# Altium PCB DEV_BOARD_NEW.PcbDoc
Units mm, origin at the board's own origin, x right, y up, seen from the top; angles counter-clockwise.
Board outline 49.4 x 24.4 mm, 2 copper layers (Top Layer, Bottom Layer); 31 components, 27 nets, 149 pads, 9 vias.
Unrouted connection lines stored in the file: 2.
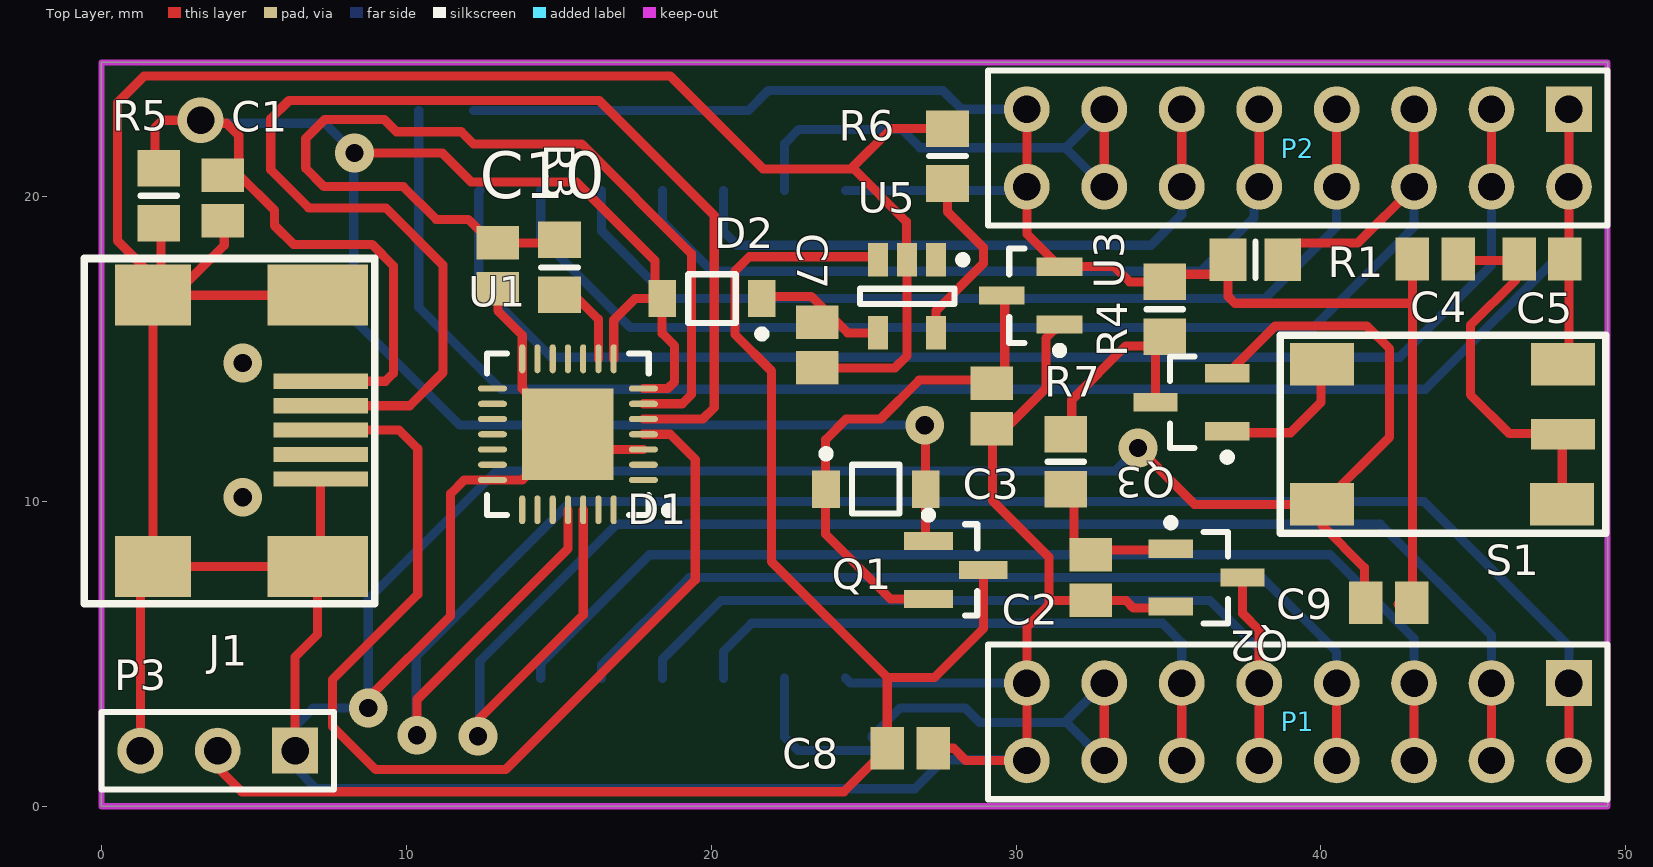
[diagram p0: Top Layer view]
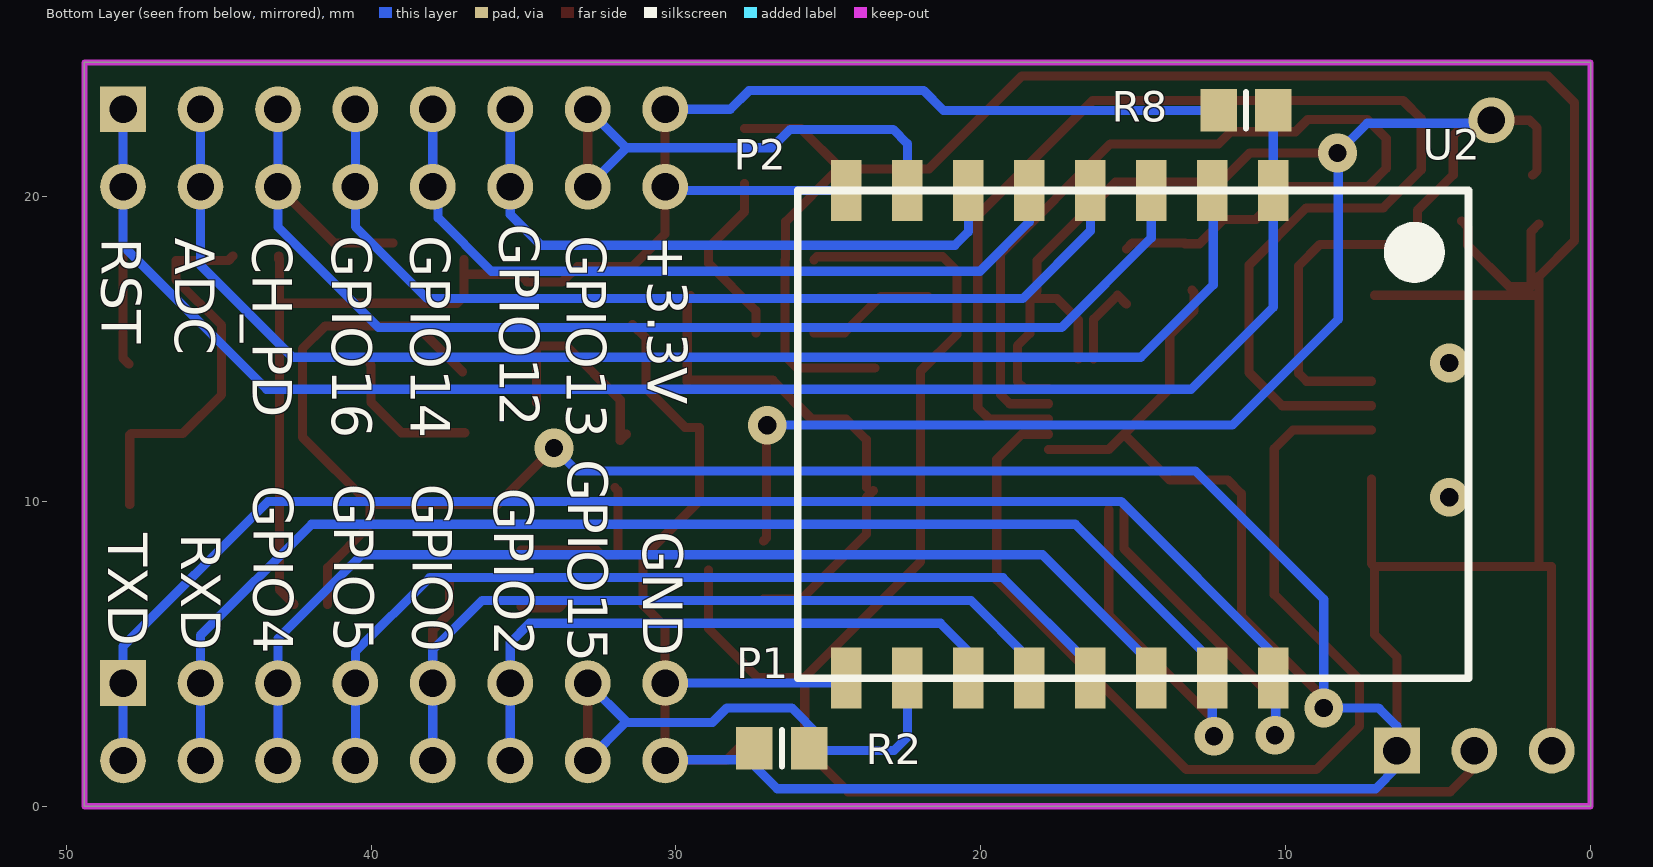
[diagram p1: Bottom Layer view, seen from below]

## Layer stack, top to bottom
Top Solder: solder mask 0.0102, Solder Resist, Dk 3.5
Top Layer: signal copper 0.0356
Dielectric 1: dielectric 0.32, FR-4, Dk 4.8
Bottom Layer: signal copper 0.0356
Bottom Solder: solder mask 0.0102, Solder Resist, Dk 3.5

## Board outline
0,0 49.4,0 49.4,24.4 0,24.4

## Design rules (kind name [scope] priority, off if disabled: settings)
Clearance [All] p1: gap=0.2
PolygonConnect [All] p1: connectstyle=Relief reliefconductorwidth=0.254 reliefentries=4 polygonreliefangle="90 Angle" airgapwidth=0.254
RoutingVias [All] p1: holewidth=0.6 width=1.3 viastyle="Through Hole" minholewidth=0.711 minwidth=1.27 maxholewidth=0.711 maxwidth=1.27
SilkToBoardRegionClearance [All] p1 off:
SilkToSilkClearance [All] p1 off: silktosilkclearance=0.254
SilkToSolderMaskClearance [IsPad] p1 off: minsilkscreentomaskgap=0.254 clearancetoexposedcopper=TRUE
SolderMaskExpansion [All] p1: expansion=0.102
Width [All] p1: maxlimit=0.5 minlimit=0.2 preferedwidth=0.3
26 further rules are at their usual default settings.

## Components (designator, comment, footprint, x,y, rotation, side; value= is the part's Value field where it differs from the comment)
C1 "1uF" C0805 3.975,19.95 r90 top
C2 "2.2uF" C0805 32.45,7.5 r90 top
C3 "1uF" C0805 29.2,13.125 r90 top
C4 "1uF" C0805 43.75,17.95 r180 top
C5 "100nF" C0805 47.25,17.95 r0 top
C7 "1uF" C0805 23.475,15.125 r90 top
C8 "1uF" C0805 26.525,1.9 r180 top
C9 "10uF" C0805 42.225,6.675 r0 top
C10 "100nF" C0805 13,17.725 r90 top
D1 "MBR0520LT1G" ONSC-SOD-123-2-425-04_V 25.4,10.4 r0 top
D2 "MBR0520LT1G" ONSC-SOD-123-2-425-04_V 20.025,16.65 r180 top
J1 "Mini usb_B" MINI_USB_B 4.2,12.2 r0 top locked
P1 "Header 8X2" HDR2X8 48.133,4.04 r180 top locked
P2 "Header 8X2" HDR2X8 48.133,22.86 r180 top locked
P3 "Header 3" HDR1X3 6.35,1.825 r180 top
Q1 "IRLML6402" SOT95P237X112-3N 28.025,7.75 r0 top
Q2 "BSS138" MICRO3_M 36.25,7.5 r0 top
Q3 "BSS138" MICRO3_M 35.75,13.25 r180 top
R1 "47K" 6-0805_N 37.85,17.925 r180 top
R2 "10K" 6-0805_N 26.525,1.9 r0 bottom
R3 "10K" 6-0805_N 15.025,17.675 r90 top
R4 "470K" 6-0805_N 34.875,16.3 r90 top
R5 "10K" 6-0805_N 1.875,20.025 r90 top
R6 "4K" 6-0805_N 27.75,21.325 r270 top
R7 "100K" 6-0805_N 31.625,11.3 r90 top
R8 "10K" 6-0805_N 11.3,22.825 r180 bottom
S1 "STMW" STMW 44,12.2 r180 top
U1 "CP2102-GM" SLAB-QFN-28-3125X3125TP_M 15.3,12.2 r180 top locked
U2 "ESP07" ESP07 15,12.2 r270 bottom locked
U3 "MCP1700T-3302E/TT" SOT-23-TT3_N 30.475,16.75 r180 top
U5 "MCP73831T-2ATI/OT" SOT-23-OT5_N 26.425,16.725 r270 top

## Footprints (in the part's own frame and the unit in brackets; to place one, negate y for a bottom-side part, rotate by r counter-clockwise, add the part's x,y. Pads: shape width x height; smd on the part's side, far side on the other; paste and mask are expansions set on the pad)
6-0805_N [mm] "Chip Resistor, Body 2.0x1.2mm, IPC Medium Density"
  rect 1.2x1.4 smd: 1(-0.9,0) 2(0.9,0)
  silkscreen extent 0,-0.6 0,0.6, body extent -1.07,-0.7 1.07,0.7, height 0.7
C0805 [mm]
  rect 1.1x1.4 smd: 1(-0.75,0) 2(0.75,0)
  body extent -1.1,-0.72 1.1,0.72, height 1.4
ESP07 [mm]
  rect 2x1 smd: 1(-8,4.594) 2(-8,2.594) 3(-8,0.594) 4(-8,-1.406) 5(-8,-3.406) 6(-8,-5.406) 7(-8,-7.406) 8(-8,-9.406) 9(8,4.594) 10(8,2.594) 11(8,0.594) 12(8,-1.406) 13(8,-3.406) 14(8,-5.406) 15(8,-7.406) 16(8,-9.406)
  silkscreen extent -8,-11 8,11
HDR1X3 [mm] "Connector; Header; 3 Position"
  rect 1.5x1.5 hole 0.9: 1(0,0)
  round 1.5 hole 0.9: 2(2.54,0) 3(5.08,0)
  silkscreen extent -1.27,-1.27 6.35,1.27
HDR2X8 [mm] "Connector; Header; 8x2 Position"
  rect 1.5x1.5 hole 0.9: 1(0,0)
  round 1.5 hole 0.9: 2(0,2.54) 3(2.54,0) 4(2.54,2.54) 5(5.08,0) 6(5.08,2.54) 7(7.62,0) 8(7.62,2.54) 9(10.16,0) 10(10.16,2.54) 11(12.7,0) 12(12.7,2.54) 13(15.24,0) 14(15.24,2.54) 15(17.78,0) 16(17.78,2.54)
  silkscreen extent -1.27,-1.27 19.05,3.81
MICRO3_M [mm] "SOT23, 3-Leads, Body 2.9x1.3mm, Pitch 0.95mm, Lead Span 2.3mm, IPC Low Density"
  rect 1.45x0.6 smd: 1(-1.175,0.95) 2(-1.175,-0.95) 3(1.175,0)
  silkscreen extent -1.3,-1.5 0.7,1.92, body extent -0.7,-1.5 0.7,1.5, height 1.12
MINI_USB_B [mm]
  rect 3.1x0.5 smd: 1(2.987,1.738) 2(2.987,0.938) 3(2.987,0.138) 4(2.987,-0.663) 5(2.987,-1.463)
  rect 2.5x2 smd: GND(-2.512,-4.337) GND(-2.512,4.563)
  rect 3.3x2 smd: GND(2.887,-4.337) GND(2.887,4.563)
  silkscreen extent -4.76,-5.56 4.76,5.76
ONSC-SOD-123-2-425-04_V [mm] "SOD, 2-Leads, Body 2.69x1.6mm"
  rect 0.91x1.22 smd: 1(-1.635,0) 2(1.635,0)
  silkscreen extent -1.76,-0.8 0.78,1.28, body extent -1.35,-0.8 1.35,0.8, height 1.35
SLAB-QFN-28-3125X3125TP_M [mm] "QFN, 28-Leads, Body 5x5mm, Pitch 0.5mm, Thermal Pad 3.13x3.13mm, IPC Low Density"
  oval 0.95x0.2 smd: 1(-2.475,1.5) 2(-2.475,1) 3(-2.475,0.5) 4(-2.475,0) 5(-2.475,-0.5) 6(-2.475,-1) 7(-2.475,-1.5) 15(2.475,-1.5) 16(2.475,-1) 17(2.475,-0.5) 18(2.475,0) 19(2.475,0.5) 20(2.475,1) 21(2.475,1.5)
  oval 0.2x0.95 smd: 8(-1.5,-2.475) 9(-1,-2.475) 10(-0.5,-2.475) 11(0,-2.475) 12(0.5,-2.475) 13(1,-2.475) 14(1.5,-2.475) 22(1.5,2.475) 23(1,2.475) 24(0.5,2.475) 25(0,2.475) 26(-0.5,2.475) 27(-1,2.475) 28(-1.5,2.475)
  rect 3x3 smd: 29(0,0)
  silkscreen extent -3.42,-2.65 2.65,2.65, body extent -2.5,-2.5 2.5,2.5, height 1
SOT95P237X112-3N [mm] "SOT23, 3-Leads, Body 2.92x2.37mm, Pitch 0.95mm, IPC Medium Density"
  rect 1.6x0.6 smd: 1(-0.9,0.95) 2(0.9,0) 3(-0.9,-0.95)
  silkscreen extent -1.02,-1.5 0.7,1.92, body extent -0.7,-1.52 0.7,1.52, height 1.12
SOT-23-OT5_N [mm] "SOT23, 5-Leads, Body 2.9x1.6mm, Pitch 0.95mm, Lead Span 2.7mm, IPC Medium Density"
  rect 1.1x0.65 smd: 1(-1.2,0.95) 2(-1.2,0) 3(-1.2,-0.95) 4(1.2,-0.95) 5(1.2,0.95)
  silkscreen extent -1.32,-1.55 0.25,1.95, body extent -0.9,-1.55 0.9,1.55, height 1.45
SOT-23-TT3_N [mm] "SOT23, 3-Leads, Body 2.9x1.3mm, Pitch 0.95mm, Lead Span 2.4mm, IPC Medium Density"
  rect 1.5x0.6 smd: 1(-0.95,0.95) 2(-0.95,-0.95) 3(0.95,0)
  silkscreen extent -1.07,-1.55 0.7,1.92, body extent -0.7,-1.52 0.7,1.53, height 1.12
STMW [mm]
  rect 2.1x1 smd: 1(-3.938,0)
  rect 2.1x1.4 smd: 1(-3.912,2.3) 1(3.962,2.3) 2(-3.938,-2.3) 2(3.962,-2.3)
  silkscreen extent -5.34,-3.25 5.34,3.25

## Part data
C1 C2 C3 C4 C5 C7 C8 C9 C10: library part Cap, "Capacitor"
D1 D2: "Schottky Power Rectifier, 2-Pin SOD-123, Pb-Free, Tape and Reel"
P1 P2: "Header, 8-Pin, Dual row"
P3: "Header, 3-Pin"
Q2 Q3: "N-Channel MOSFET"
R1 R2 R3 R4 R5 R6 R7 R8: library part Res2, "Resistor"
S1: "Switch"
U1: "Single-Chip USB to UART Bridge, 1024 Bytes EEPROM, -40 to 85 degC, 28-pin QFN, Tube"
U2: "ESP8266"
U3: "Low Quiescent Current LDO, 3-Pin SOT-23, Extended Temperature, Tape and Reel"
U5: "Miniature Single-Cell, Fully Integrated Li-Ion, Li-Polymer Charge Management Controller, 4.2V, 5-Pin SOT-23, Industrial Temperature, Tape and Reel"

## Via types
v1: diameter 1.27, hole 0.6, Top Layer to Bottom Layer, 8 vias
v2: diameter 1.5, hole 0.9, Top Layer to Bottom Layer, 1 vias

## Nets (pads, with @x,y where several pads share a name; then routed paths per layer and width w, separated by ;. In a path a pad name is that pad's centre, name@x,y a point inside that pad or via, vN(x,y) a via of type N, cw(c..) or ccw(c..) an arc to the next point about the centre after c; other vN are vias at no path point)
3.3V: C4.2 C9.2 P2.15 P2.16 R1.2 R4.2 R8.1 U2.8 U3.2 | length 55.1
  Top Layer w0.3: P2.15 P2.16 30.353,18.772 U3.2 33.225,17.7 33.725,17.2 R4.2 35.125,17.45 R1.2@36.95,17.45 ; R1.2 R1.2@36.95,17.45 ; C9.2@42.525,6.625 43,7.1 43,8.725 C4.2 ; 43,16.5 37.175,16.5 36.95,16.725 R1.2@36.95,17.45 ; C4.2@43.025,17.95 C4.2@43.025,18.05
  Bottom Layer w0.3: R8.1 21.225,22.825 21.875,23.475 27.6,23.475 28.215,22.86 P2.15 ; U2.8 30.233,20.2 P2.16
ADC: P2.3 P2.4 U2.2 | length 46.2
  Top Layer w0.3: P2.4 P2.3
  Bottom Layer w0.3: U2.2 12.375,20.169 12.375,17.1 14.75,14.725 42.575,14.725 45.593,17.743 P2.4 P2.3
ENABLE: P2.5 P2.6 R1.1 U2.3 | length 43.7
  Top Layer w0.3: R1.1@39.275,18.475 41.208,18.475 P2.6 P2.5
  Bottom Layer w0.3: U2.3@14.4,20.206 U2.3 14.406,18.644 17.35,15.7 39.75,15.7 43.053,19.003 P2.6 P2.5
GND: C1.1 C2.1 C3.1 C4.1 C5.1 C7.1 C8.1 C9.1 C10.1 J1.5 J1.GND P1.15 P1.16 P3.1 P3.3 Q2.2 Q3.2 R2.2 R5.1 R6.1 S1.1 U1.3 U1.14 U1.21 U1.29 U2.16 U3.1 U5.2 | length 234.8
  Top Layer w0.2: P3.3@1.27,1.275 P3.3@1.275,1.28
  Top Layer w0.3: P3.3@1.275,1.28 1.275,7.863 J1.GND@1.687,7.863 ; R5.1@1.7,19.1 1.95,18.85 1.95,17.05 2.675,17.05 4.025,18.4 4.025,19 C1.1@4.225,19.2 ; P3.1@6.35,1.275 6.35,4.9 7.087,5.637 J1.GND@7.087,7.863 ; J1.GND@7.087,16.763 J1.GND@1.687,16.763 ; J1.5 7.187,7.963 J1.GND@7.087,7.863 ; v1@8.6,2.9 v1@8.775,2.725 ; v1(8.75,3.225) 8.75,3.55 11.45,6.25 11.45,10.25 11.9,10.7 U1.21 13.8,10.7 U1.29 ; C10.1@13.075,16.925 13,16.85 13,16.25 13.8,15.45 U1.14 13.8,13.7 U1.29 ; U1.3 15.8,11.7 U1.29 ; C7.1 26.025,14.375 26.425,14.775 U5.2 26.4,17.95 26.4,19.175 24.637,20.937 ; C8.1 27.95,1.9 28.35,1.5 P1.16 P1.15 30.353,5.878 31.075,6.6 31.075,8.175 29.225,10.025 29.225,12.425 29.7,12.425 30.975,13.7 30.975,15.35 U3.1 ; R6.1 25.9,22.225 24.575,20.9 21.7,20.9 18.65,23.95 1.4,23.95 0.525,23.075 0.525,18.55 1.687,17.388 J1.GND@1.687,16.763 ; 31.225,6.75 C2.1 33.6,6.75 33.85,6.5 35.025,6.5 Q2.2 ; v1(34,11.75) 35.85,9.9 S1.1@40.038,9.9 ; Q3.2@37,14.25 38.5,15.75 41.5,15.75 42.25,15 42.25,12.112 S1.1@40.038,9.9 ; C9.1@41.425,6.625 41.425,7.825 40.038,9.212 S1.1@40.038,9.9 ; C4.1@44.525,18.05 44.675,17.9 46.4,17.9 46.4,17.275 44.9,15.775 44.9,13.5 46.175,12.225 47.863,12.225 47.913,12.175 S1.1@47.913,9.9 ; J1.GND@1.687,7.863 J1.GND@1.687,16.763 ; J1.GND@1.687,7.863 J1.GND@7.087,7.863
  Bottom Layer w0.3: U2.16 24.566,4.04 P1.15 ; P1.16 30.328,1.525 27.625,1.525 26.675,0.575 7.05,0.575 6.35,1.275 6.35,2.625 6.925,3.2 6.95,3.2 6.975,3.225 v1(8.75,3.225) 8.75,6.788 12.962,11 33.25,11 v1(34,11.75)
GPIO0: P1.9 P1.10 Q2.3 U2.13 | length 31.5
  Top Layer w0.3: Q2.3 37.425,6.325 37.973,5.777 P1.9 P1.10
  Bottom Layer w0.3: U2.13 18.406,4.831 20.325,6.75 36.35,6.75 37.973,5.127 P1.9 P1.10
GPIO2: P1.11 P1.12 U2.14 | length 23
  Top Layer w0.3: P1.12 P1.11
  Bottom Layer w0.3: U2.14 20.406,5.081 21.325,6 34.8,6 35.433,5.367 P1.11 P1.12
GPIO4: P1.5 P1.6 U2.11 | length 38.3
  Top Layer w0.3: P1.6 P1.5
  Bottom Layer w0.3: U2.11 14.406,4.681 17.975,8.25 40.3,8.25 43.053,5.497 P1.5 P1.6
GPIO5: P1.7 P1.8 U2.12 | length 32.8
  Top Layer w0.3: P1.8 P1.7
  Bottom Layer w0.3: U2.12 16.406,4.631 19.275,7.5 38.075,7.5 40.513,5.062 P1.7 P1.8
GPIO12: P2.11 P2.12 U2.6 | length 23
  Top Layer w0.3: P2.12 P2.11
  Bottom Layer w0.3: U2.6 20.406,18.844 20.85,18.4 34.425,18.4 35.433,19.408 P2.12 P2.11
GPIO13: P2.13 P2.14 U2.7 | length 17.3
  Top Layer w0.3: P2.14 P2.13
  Bottom Layer w0.3: U2.7 22.406,21.731 22.875,22.2 26.25,22.2 26.85,21.6 31.633,21.6 ; P2.14 31.633,21.58 31.633,21.6 ; P2.13 31.633,21.6
GPIO14: P2.9 P2.10 U2.5 | length 28
  Top Layer w0.3: P2.10 P2.9
  Bottom Layer w0.3: U2.5 18.406,19.169 20.025,17.55 36.05,17.55 37.8,19.3 37.8,20.147 P2.10 P2.9
GPIO15: P1.13 P1.14 R2.1 U2.15 | length 19.1
  Top Layer w0.3: P1.14 P1.13
  Bottom Layer w0.3: U2.15 22.406,2.269 22.85,1.825 25.7,1.825 25.275,2.25 25.275,2.3 26.2,3.225 28.325,3.225 28.8,2.75 31.603,2.75 ; P1.14 31.643,2.75 31.603,2.75 ; P1.13 31.603,2.75
GPIO16: P2.7 P2.8 U2.4 | length 33.7
  Top Layer w0.3: P2.8 P2.7
  Bottom Layer w0.3: U2.4 16.406,18.869 18.625,16.65 38.15,16.65 40.513,19.013 P2.8 P2.7
NetC2_2: C2.2 Q2.1 R7.1 | length 5.5
  Top Layer w0.3: R7.1@32,10.45 31.9,10.35 31.9,8.25 C2.2 32.6,8.4 Q2.1@35.075,8.4
NetC3_2: C3.2 D1.1 Q1.3 U3.3 | length 16.9
  Top Layer w0.3: D1.1@23.525,10.35 23.75,10.125 23.75,8.925 25.875,6.8 Q1.3 ; D1.1@23.75,10.45 23.75,12.025 24.425,12.7 25.55,12.7 26.825,13.975 29.575,13.975 29.625,13.925 29.625,16.65 U3.3
NetC7_2: C7.2 D2.1 U5.4 | length 4.3
  Top Layer w0.3: D2.1 21.735,16.725 23.275,16.725 24.475,15.525 U5.4
NetC8_2: C8.2 P3.2 Q1.2 U5.3 | length 51.8
  Top Layer w0.3: P3.2 3.81,1.265 4.6,0.475 24.35,0.475 C8.2 25.775,4.225 ; U5.3 25.375,18.025 21.25,18.025 20.775,17.55 20.775,15.475 21.975,14.275 21.975,8.025 25.775,4.225 ; Q1.2 28.925,5.825 27.325,4.225 25.775,4.225
NetC10_2: C10.2 R3.2 U1.6 | length 31.7
  Top Layer w0.3: R3.2@15.225,18.275 15.025,18.475 13.3,18.475 13.3,18.45 12.825,18.45 12.025,19.25 10.975,19.25 9.9,20.325 7.3,20.325 6.7,20.925 6.7,21.9 7.325,22.525 9.275,22.525 9.675,22.125 11.8,22.125 12.2,21.725 15.75,21.725 19.35,18.125 19.35,13.5 19.05,13.2 U1.6
NetJ1_2: J1.2 U1.5 | length 41.7
  Top Layer w0.3: J1.2 10.113,13.138 11.2,14.225 11.2,17.75 9.325,19.625 6.8,19.625 5.55,20.875 5.55,22.55 6.15,23.15 16.325,23.15 20.1,19.375 20.1,13.075 19.725,12.7 U1.5
NetJ1_3: J1.3 U1.4 | length 34.8
  Top Layer w0.3: J1.3 9.762,12.338 10.375,11.725 10.375,6.95 7.575,4.15 7.575,2.625 9,1.2 13.25,1.2 19.475,7.425 19.475,11.375 18.65,12.2 U1.4
NetQ3_3: Q3.3 R4.1 R7.2 | length 6.9
  Top Layer w0.3: R7.2 31.825,12 31.825,13.325 33.6,15.1 34.575,15.1 Q3.3
NetR3_1: R3.1 U1.9 | length 2.8
  Top Layer w0.3: R3.1@15.225,16.475 15.512,16.763 16.3,15.975 U1.9
NetR6_2: R6.2 U5.5 | length 6
  Top Layer w0.3: U5.5 27.375,16.25 28.925,17.8 28.925,18.325 27.75,19.5 R6.2
RESET: C5.2 P2.1 P2.2 Q3.1 R8.2 S1.2 U2.1 | length 64.9
  Top Layer w0.3: Q3.1@36.925,12.25 39,12.25 40,13.25 40,14.462 S1.2@40.038,14.5 ; S1.2@47.938,14.5 48.133,14.695 P2.2 P2.1
  Bottom Layer w0.3: R8.2 10.406,22.819 U2.1 10.406,16.369 13.1,13.675 43.425,13.675 48.133,18.383 P2.2 P2.1
RXD: P1.3 P1.4 U1.26 U2.10 | length 54.8
  Top Layer w0.3: v1@12.475,2.1 12.375,2.2 12.375,2.85 15.8,6.275 U1.26 ; P1.4 P1.3
  Bottom Layer w0.3: v1@12.4,2.225 12.406,2.231 U2.10 12.406,4.756 16.9,9.25 41.95,9.25 45.593,5.607 P1.3 P1.4
  other v1: 12.35,2.3
TXD: P1.1 P1.2 U1.25 U2.9 | length 60.2
  Top Layer w0.3: v1@10.325,2.325 10.35,2.35 10.35,3.5 15.3,8.45 U1.25 ; P1.2 P1.1
  Bottom Layer w0.3: v1@10.325,2.325 10.325,4.925 15.4,10 43.375,10 48.133,5.242 P1.1 P1.2
  other v1: 10.35,2.325
VCC_USB: C1.2 D1.2 D2.2 J1.1 Q1.1 R5.2 U1.7 U1.8 | length 73.2
  Top Layer w0.3: R5.2@1.9,20.7 1.75,20.85 1.75,22.25 2,22.5 3.1,22.5 3.2,22.4 4.1,22.4 4.5,22 4.5,20.7 4.525,20.7 5.675,19.55 5.675,19.05 6.3,18.425 8.875,18.425 9.575,17.725 9.575,14.2 9.313,13.938 J1.1 ; v1(8.3,21.425) 11.175,21.425 12.125,20.475 15.575,20.475 18.15,17.9 18.15,16.89 D2.2 ; U1.8 16.8,15.95 17.5,16.65 D2.2 ; U1.7 18.575,13.7 18.8,13.925 18.8,15.1 18.39,15.51 D2.2 ; Q1.1 27.025,8.8 27.025,12.2 v1@27.125,12.1
  Bottom Layer w0.3: v2@3.2,22.45 3.25,22.4 7.325,22.4 8.275,21.45 8.275,15.975 11.75,12.5 26.675,12.5 v1@26.9,12.275
  other v1: 27,12.5
  other v2: 3.25,22.5
pads on no net: J1.4 U1.1 U1.2 U1.10 U1.11 U1.12 U1.13 U1.15 U1.16 U1.17 U1.18 U1.19 U1.20 U1.22 U1.23 U1.24 U1.27 U1.28 U5.1
copper on no net:
  other v1: 4.637,10.138 4.637,14.538

## Keep-outs
Keep-Out Layer:
  the board outline again, w0.2

## Silkscreen, mask and mechanical layers (free items; w line width, h text height)
Bottom Overlay:
  text "GPIO12" at 35.775,19.1 h1.3 r90
  text "+3.3V" at 30.925,18.725 h1.3 r90
  text "GPIO13" at 33.575,18.725 h1.3 r90
  text "GPIO14" at 38.7,18.725 h1.3 r90
  text "GPIO16" at 41.275,18.725 h1.3 r90
  text "CH_PD" at 43.875,18.7 h1.3 r90
  text "ADC" at 46.425,18.65 h1.3 r90
  text "RST" at 48.825,18.65 h1.3 r90
  text "GPIO15" at 33.525,11.375 h1.3 r90
  text "GPIO0" at 38.625,10.575 h1.3 r90
  text "GPIO5" at 41.2,10.575 h1.3 r90
  text "GPIO4" at 43.85,10.525 h1.3 r90
  text "GPIO2" at 35.95,10.45 h1.3 r90
  text "GND" at 31.075,9.025 h1.3 r90
  text "RXD" at 46.225,8.95 h1.3 r90
  text "TXD" at 48.625,8.95 h1.3 r90